# EAGLE board 36s_Cell_Fixtures_54 (EAGLE 5.12)

Size 474.96 x 196.52 mm. Coordinates in mm from the lower left corner, seen from the top.
Outline: 0,0 474.96,0 474.96,196.52 0,196.52 0,0
Copper layers (1*16): Top 0.035mm / dielectric 1.5mm / Bottom 0.035mm
Design rules "default": minimum track width 10mil, minimum drill 24mil, track to track 8mil, track to pad 8mil, pad to pad 8mil, via to via 8mil, smd to smd 8mil, copper to edge 40mil, drill to drill 8mil, minimum pad ring 10mil, minimum via ring 8mil, stop-mask expansion 4mil, vias tented up to drill 0mil, thermal gap 10mil

## Footprints (pad centres in the part's own frame; a part is rotated, then mirrored left to right if it is on the bottom)
18650-4BATT = drill 1.66 round: BATT+1 37.8,30; BATT+2 -37.8,10; BATT+3 37.8,-10; BATT+4 -37.8,-30; BATT-1 -37.8,30; BATT-2 37.8,10; BATT-3 -37.8,-10; BATT-4 37.8,-30 | hole 3.3: -28.9,30; -28.9,10; -28.9,-10; -28.9,-30; 28.9,-30; 28.9,-10; 28.9,10; 28.9,30

## Placement (x,y rotation side)
U$1  18-650_4BATTHOLDER  [18650-4BATT]  48.26,46.99 90 top
U$2  18-650_4BATTHOLDER  [18650-4BATT]  140.97,46.99 90 top
U$3  18-650_4BATTHOLDER  [18650-4BATT]  233.68,46.99 90 top
U$4  18-650_4BATTHOLDER  [18650-4BATT]  328.93,48.26 90 top
U$5  18-650_4BATTHOLDER  [18650-4BATT]  420.37,97.79 180 top
U$6  18-650_4BATTHOLDER  [18650-4BATT]  327.66,139.7 270 top
U$7  18-650_4BATTHOLDER  [18650-4BATT]  232.41,139.7 270 top
U$8  18-650_4BATTHOLDER  [18650-4BATT]  139.7,139.7 270 top
U$9  18-650_4BATTHOLDER  [18650-4BATT]  46.99,139.7 270 top

## Library data of the parts
U$1-U$9 = MPD; PARTNO: BK-18650-PC8

## Nets
N$1: U$1.BATT+1 U$1.BATT-2
N$2: U$1.BATT+2 U$1.BATT-3
N$3: U$1.BATT+3 U$1.BATT-4
N$4: U$1.BATT+4 U$2.BATT-1
N$5: U$2.BATT+1 U$2.BATT-2
N$6: U$2.BATT+2 U$2.BATT-3
N$7: U$2.BATT+3
N$8: U$2.BATT+4 U$3.BATT-1
N$9: U$3.BATT+1 U$3.BATT-2
N$10: U$3.BATT+2 U$3.BATT-3
N$11: U$3.BATT+3
N$12: U$3.BATT+4 U$4.BATT-1
N$13: U$4.BATT+1 U$4.BATT-2
N$14: U$4.BATT+2 U$4.BATT-3
N$15: U$4.BATT+3 U$4.BATT-4
N$16: U$4.BATT+4 U$5.BATT-1
N$17: U$5.BATT+1 U$5.BATT-2
N$18: U$5.BATT+2 U$5.BATT-3
N$19: U$5.BATT+3 U$5.BATT-4
N$20: U$5.BATT+4 U$6.BATT-1
N$21: U$6.BATT+1
N$22: U$6.BATT+2 U$6.BATT-3
N$23: U$6.BATT+3 U$6.BATT-4
N$24: U$6.BATT+4 U$7.BATT-1
N$25: U$7.BATT+1 U$7.BATT-2
N$26: U$7.BATT+2
N$27: U$7.BATT+3 U$7.BATT-4
N$28: U$7.BATT+4 U$8.BATT-1
N$29: U$8.BATT+1 U$8.BATT-2
N$30: U$8.BATT+2 U$8.BATT-3
N$31: U$8.BATT+3 U$8.BATT-4
N$32: U$8.BATT+4 U$9.BATT-1
N$33: U$9.BATT+1 U$9.BATT-2
N$34: U$9.BATT+2 U$9.BATT-3
N$35: U$9.BATT+3 U$9.BATT-4

## Tracks (layer width: path | path; a pad name or v marks a point on that pad's centre or on a via)
N$1  (1 unrouted)
N$2  (1 unrouted)
N$3  (1 unrouted)
N$4  (1 unrouted)
N$5  (1 unrouted)
N$6  (1 unrouted)
N$8  (1 unrouted)
N$9  (1 unrouted)
N$10  (1 unrouted)
N$12  (1 unrouted)
N$13  (1 unrouted)
N$14  (1 unrouted)
N$15  (1 unrouted)
N$16  (1 unrouted)
N$17  (1 unrouted)
N$18  (1 unrouted)
N$19  (1 unrouted)
N$20  (1 unrouted)
N$22  (1 unrouted)
N$23  (1 unrouted)
N$24  (1 unrouted)
N$25  (1 unrouted)
N$27  (1 unrouted)
N$28  (1 unrouted)
N$29  (1 unrouted)
N$30  (1 unrouted)
N$31  (1 unrouted)
N$32  (1 unrouted)
N$33  (1 unrouted)
N$34  (1 unrouted)
N$35  (1 unrouted)